# Altium PCB T245_1v1.PcbDoc (part 2 of 2)
Units mm, origin at the board's own origin, x right, y up, seen from the top; angles counter-clockwise.
Board outline 126 x 115 mm, 2 copper layers (Top Layer, Bottom Layer); 137 components, 88 nets, 465 pads, 274 vias.
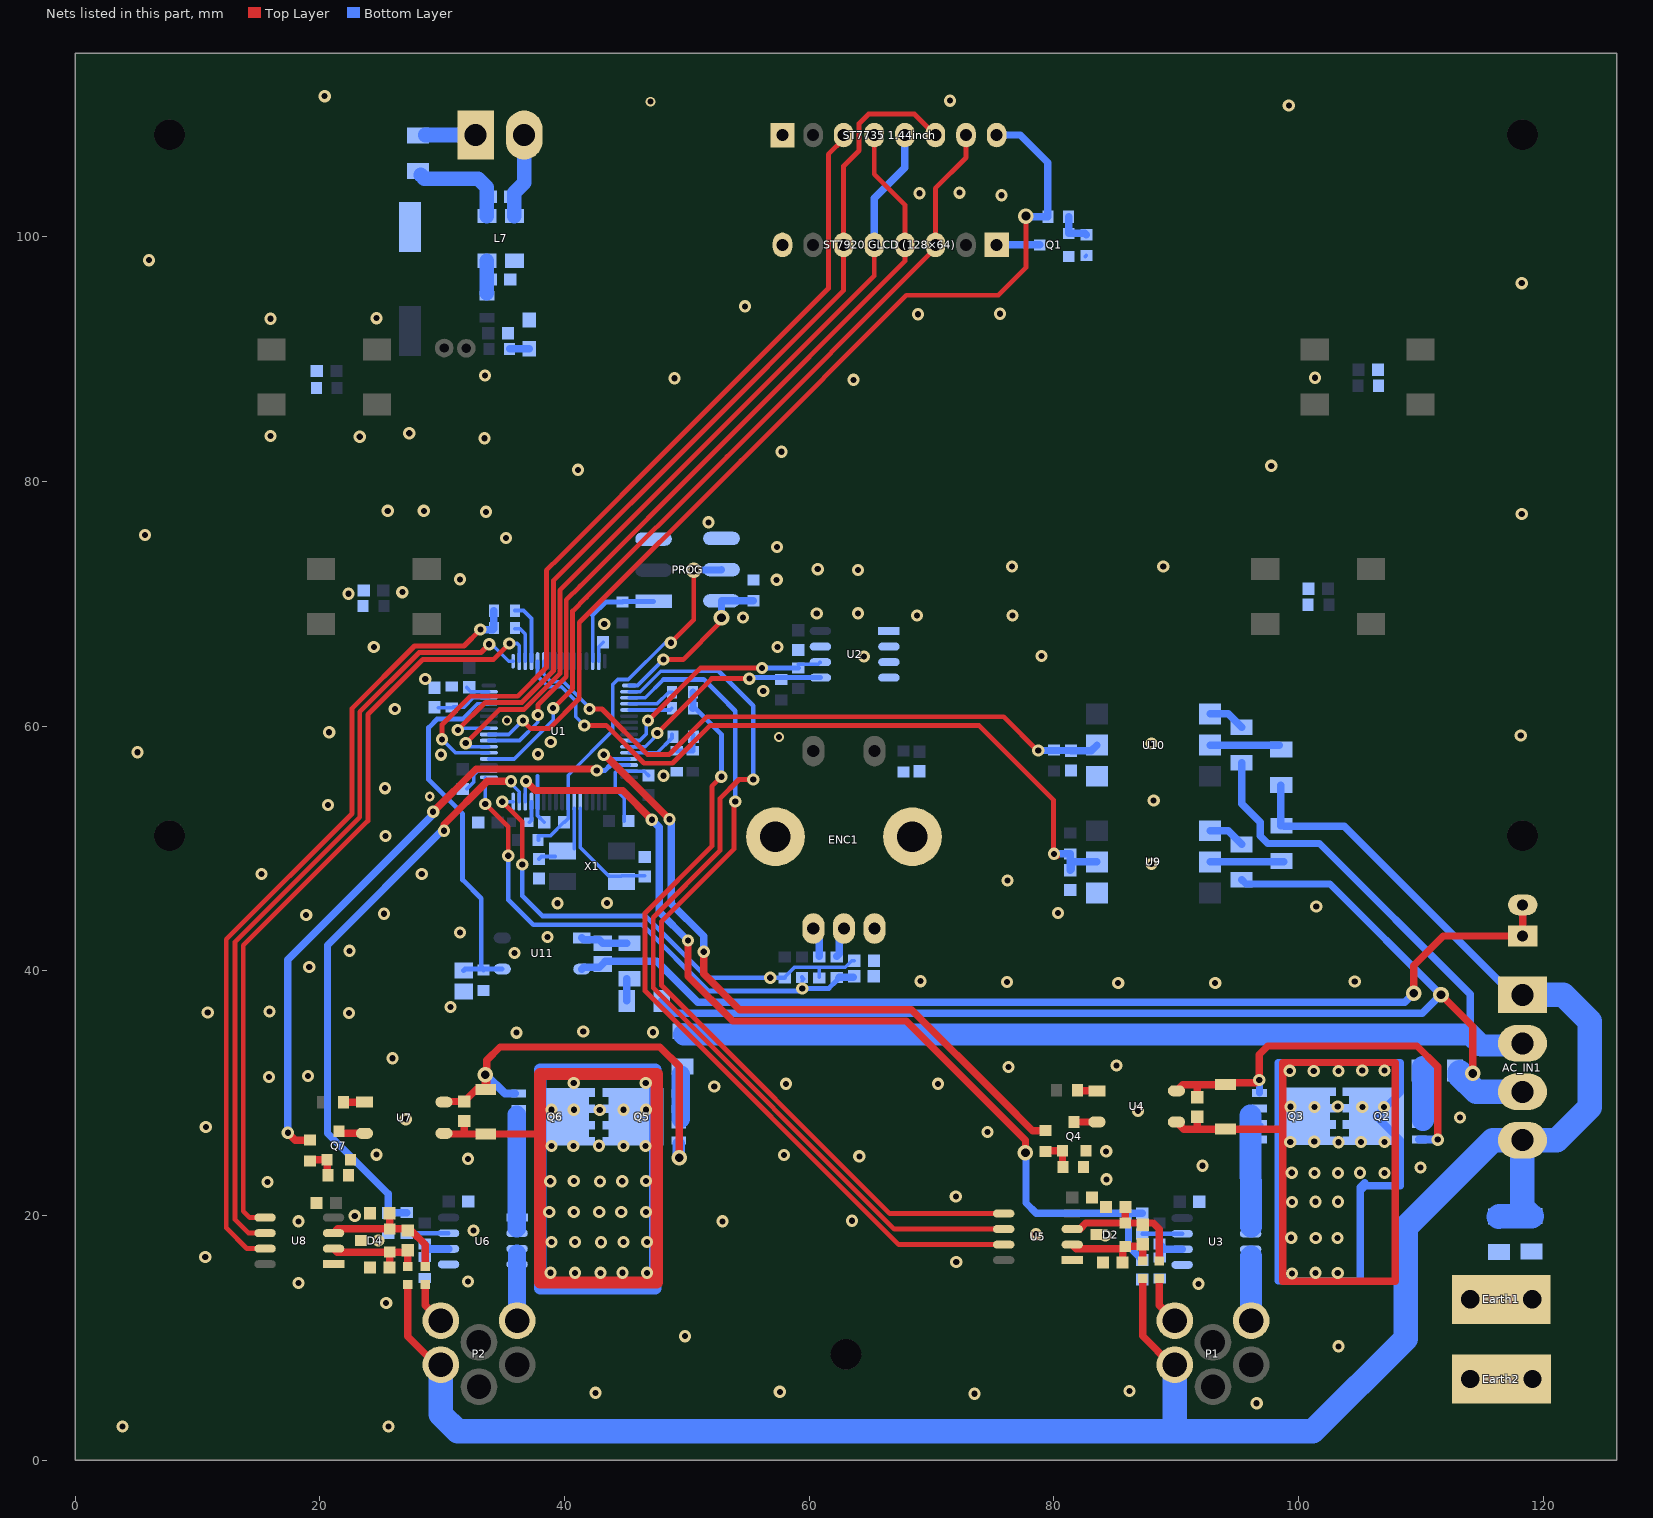
[diagram p2: the nets of this part, all layers, seen from the top]

## Via types
v1: diameter 1, hole 0.5, Top Layer to Bottom Layer, tented both sides, 191 vias
v2: diameter 1, hole 0.5, Top Layer to Bottom Layer, 58 vias
v3: diameter 1.27, hole 0.711, Top Layer to Bottom Layer, tented both sides, 21 vias
v4: diameter 0.8, hole 0.5, Top Layer to Bottom Layer, tented both sides, 3 vias
v5: diameter 0.8, hole 0.4, Top Layer to Bottom Layer, tented both sides, 1 vias

## Nets (pads, with @x,y where several pads share a name; then routed paths per layer and width w, separated by ;. In a path a pad name is that pad's centre, name@x,y a point inside that pad or via, vN(x,y) a via of type N, cw(c..) or ccw(c..) an arc to the next point about the centre after c; other vN are vias at no path point) (continued)
CS_1: U1.50 U5.6 | length 75.9
  Top Layer w0.4: v1(55.42,55.64) 54.25,55.64 52.69,54.08 52.69,49.81 47.24,44.36 47.24,38.6 66.955,18.885 U5.6@75.89,18.885
  Bottom Layer w0.3: U1.50@45.275,62.82 46.19,62.82 47.85,64.48 52.599,64.48
  Bottom Layer w0.4: 52.599,64.48 55.42,61.659 v1(55.42,55.64)
CS_2: U1.33 U8.6 | length 64.1
  Top Layer w0.4: U8.6@15.51,18.555 14.165,18.555 13.04,19.68 13.04,42.34 23.25,52.55 23.25,61.17 28.1,66.02 33.16,66.02 v1(33.83,66.69)
  Bottom Layer w0.3: v1(33.83,66.69) 34.05,66.69 35.432,65.308 U1.33@35.787,65.308
Current_1: C23.1 R23.1 U1.14 | length 79.7
  Top Layer w0.6: v1(36.83,55.5) 37.59,54.74 44.74,54.74 v1(47.13,52.35) ; v1(50.08,42.48) 50.08,39.54 53.73,35.89 67.93,35.89 77.67,26.15 v3(77.67,25.12)
  Bottom Layer w0.3: U1.14@36.787,53.832 36.787,55.5 v1(36.83,55.5)
  Bottom Layer w0.6: v1(47.13,52.35) 47.74,51.74 47.74,44.82 v1(50.08,42.48) ; v3(77.67,25.12) 77.72,25.07 77.72,21.02 78.56,20.18 R23.1@87.21,20.18 ; 86.09,20.13 86.09,17.48 C23.1@87.21,16.36
Current_2: C30.1 R29.1 U1.15 | length 47.9
  Top Layer w0.6: v1(30.14,51.45) 30.14,51.96 33.67,55.49 v1(35.62,55.49) v1@35.74,55.49
  Bottom Layer w0.3: v1@35.68,55.24 36.287,54.633 U1.15@36.287,53.832
  Bottom Layer w0.6: R29.1@27.09,20.23 25.62,20.23 C30.1@25.58,20.19 25.58,21.76 20.61,26.73 20.61,42.09 v1@29.92,51.4
Drive_1: R21.1 U1.61 | length 57
  Top Layer w0.3: v1@43.197,57.473 v1(43.197,57.66)
  Top Layer w0.6: v1@43.249,57.711 47.47,53.49 v1(48.57,52.39) ; v1(51.37,41.56) 51.37,39.75 54.3,36.82 68.36,36.82 75.69,29.49 78.25,26.93 R21.1@79.31,26.93
  Bottom Layer w0.3: v1(43.197,57.66) 43.397,57.66 43.737,57.32 U1.61@45.275,57.32
  Bottom Layer w0.6: v1(48.57,52.39) 48.72,52.24 48.72,45.49 51.37,42.84 v1(51.37,41.56)
Drive_2: R27.1 U1.62 | length 50.5
  Top Layer w0.6: v1(17.37,26.76) 17.98,26.15 R27.1@19.19,26.15 ; v1(29.25,53) 32.75,56.5 v1@42.62,56.5
  Bottom Layer w0.3: 43.747,56.82 U1.62@45.275,56.82
  Bottom Layer w0.4: v1(42.62,56.38) 43.307,56.38 43.747,56.82
  Bottom Layer w0.6: v1(17.37,26.76) 17.37,40.91 v1@29.09,52.63
ENC_A: C9.1 R12.1 R13.1 U1.16 | length 40.5
  Top Layer w0.4: v1(34.9,53.82) 36.53,52.19 v1@36.53,48.77
  Bottom Layer w0.3: v1(34.9,53.82) 35.775,53.82 U1.16@35.787,53.832 ; R12.1@57.99,39.49 58.79,40.29 60.82,40.29 ; R13.1@60.82,39.48 60.82,40.29 ; C9.1@63.68,40.83 63.47,40.83 62.93,40.29 60.82,40.29
  Bottom Layer w0.4: v1(36.53,48.68) 36.53,46.13 38.17,44.49 46.6,44.49 51.66,39.43 v1(56.81,39.43) R12.1@57.99,39.43
ENC_B: C11.1 R11.1 R16.1 U1.17 | length 43.8
  Top Layer w0.4: v1(33.51,53.64) 35.39,51.76 35.39,49.63 v1@35.6,49.42
  Bottom Layer w0.3: v1(33.51,53.64) U1.17@33.51,55.79 ; R11.1@59.41,39.49 R11.1@59.41,39.44 59.52,39.33 59.42,39.23 v1(59.42,38.56) ; R16.1@62.25,39.21 R16.1@62.25,39.44 ; R16.1@62.325,39.365 R16.1@62.44,39.48 ; C11.1@63.6,39.48 C11.1@63.67,39.55
  Bottom Layer w0.4: v1(35.39,49.4) 35.39,45.8 37.43,43.76 46.34,43.76 51.75,38.35 59.21,38.35 v1(59.42,38.56) 61.6,38.56 R16.1@62.25,39.21
  Bottom Layer w0.6: R16.1@62.44,39.48 C11.1@63.6,39.48
GND: "ST7735 1.44inch.1" "ST7920 GLCD (128×64).8" +3V3DC.2 C1.2 C2.2 C3.1 C4.2 C5.2 C6.1 C7.1 C8.1 C9.2 C10.2 C11.2 C12.1 C13.1 C14.1 C15.1 C16.1 C17.1 C18.1 C22.1 C23.2 C24.2 C25.2 C27.1 C29.1 C30.2 C31.2 C32.2 C34.1 C36.1 C37.2 C38.1 C40.2 C42.2 C44.2 CB2.1 CB4.1 CB6.1 CB8.1 D2.3 D4.3 Earth1.1 Earth2.1 ENC1.2 ENC1.6 ENC1.7 F4.2 L7.2 PROG.5 PROG.6 Q1.2 Q4.2 Q7.2 R2.1 R3.1 R5.1 R6.1 R8.1 R10.1 R17.1 R22.1 R28.1 R39.1 R41.1 U1.12 U1.18 U1.31 U1.47 U1.63 U2.1 U2.2 U2.3 U2.4 U2.7 U3.5 U5.1 U6.5 U8.1 U9.4 U10.4 | length 17.7
  Bottom Layer w0.3: C15.1@31.987,63.16 32.327,62.82 U1.31@33.799,62.82 ; C16.1@32.007,54.87 32.557,55.42 32.557,55.99 32.887,56.32 U1.18@33.799,56.32 ; 37.787,55.941 U1.12@37.787,53.832 37.787,52.69 C3.1@38.337,52.14 ; U1.47@42.787,65.308 42.787,66.5 C13.1@43.147,66.86 ; C17.1@44.877,52.24 44.877,54.12 44.137,54.86 44.137,56.22 44.237,56.32 U1.63@45.275,56.32 46.507,56.32 C14.1@46.857,55.97 ; R8.1@82.57,98.39 R8.1@82.65,98.47
  other v1: 3.85,2.74 25.6,2.74 96.57,4.65 73.51,5.42 42.53,5.5 57.59,5.58 86.17,5.66 103.25,9.3 49.84,10.13 25.41,12.84 91.81,14.41 18.24,14.48 32.11,14.6 72.01,16.2 10.62,16.61 24.76,17.95 84.19,18.39 78.53,18.47 32.55,18.76 18.24,19.52 52.91,19.52 63.5,19.57 22.84,19.97 71.98,21.54 15.71,22.74 84.3,22.95 109.96,23.92 92.14,24.06 32.11,24.63 64.09,24.83 57.94,24.95 24.63,24.97 84.27,25.24 74.56,26.82 10.67,27.24 27.01,27.87 113.19,28.01 86.88,28.53 52.23,30.54 58.1,30.76 70.51,30.76 15.84,31.31 19.03,31.41 76.29,32.13 85.12,32.25 25.93,32.85 36.07,34.94 47.22,34.98 41.52,35.04 22.38,36.56 10.82,36.59 15.88,36.67 30.66,37.05 85.25,39 93.18,39 76.17,39.08 104.59,39.12 69.09,39.15 19.12,40.31 35.91,41.46 22.42,41.63 38.6,42.76 31.44,43.14 18.87,44.57 25.24,44.66 80.34,44.72 101.44,45.26 39.41,45.52 43.46,45.54 76.21,47.38 28.32,47.91 15.22,47.92 87.98,48.73 25.36,51.01 20.66,53.56 88.15,53.92 25.32,54.93 48.09,55.94 29.89,57.67 37.83,57.71 5.09,57.87 87.98,58.59 38.86,58.71 118.16,59.23 20.75,59.5 26.12,61.4 56.24,62.87 28.6,63.85 64.47,65.7 78.99,65.74 24.4,66.47 57.39,66.46 43.24,68.36 54.57,68.87 68.81,69.05 76.62,69.05 60.61,69.21 63.98,69.22 22.34,70.82 26.73,70.95 57.33,71.96 31.44,72 63.99,72.77 60.69,72.83 76.58,73.06 88.93,73.06 57.35,74.64 35.2,75.39 5.69,75.63 51.76,76.66 118.24,77.34 33.56,77.52 25.54,77.6 28.49,77.6 41.09,80.95 97.76,81.28 57.73,82.43 33.44,83.53 23.25,83.66 15.96,83.72 27.3,83.94 63.62,88.31 48.98,88.44 101.35,88.48 33.49,88.67 15.96,93.3 24.62,93.35 68.89,93.67 75.6,93.71 54.74,94.32 118.24,96.21 6.03,98.09 75.72,103.4 69.01,103.56 72.28,103.61 99.2,110.73 71.51,111.13 20.38,111.5
  other v4: 57.52,59.12 35.28,60.45 47.01,111.05
  other v5: 28.97,54.24
HIB_1: C44.1 R41.2 U1.29 U11.3 | length 30.6
  Bottom Layer w0.3: 31.64,60.58 32.88,61.82 U1.29@33.799,61.82
  Bottom Layer w0.4: 31.64,60.58 29.58,60.58 28.88,59.88 28.88,55.62 31.66,52.84 31.66,47.43 33.18,45.91 33.18,40.32 R41.2@33.36,40.14 ; C44.1@31.74,40.02 31.86,40.14 R41.2@33.36,40.14 ; R41.2@33.36,40.07 R41.2@33.36,40.14 ; U11.3@34.9,40.14 R41.2@33.36,40.14
MISO_1: CB13.1 CB14.2 U5.7 | length 66.2
  Top Layer w0.4: v1@53.03,55.69 52.63,55.69 52.03,55.09 52.03,50.18 46.57,44.72 46.57,38.36 67.315,17.615 U5.7@75.89,17.615
  Bottom Layer w0.4: CB13.1@50.477,61.46 50.69,61.46 52.81,59.34 v1(52.81,55.86)
  Bottom Layer w0.6: CB13.1@50.477,61.46 50.487,61.47 CB14.2@50.487,62.77
MISO_2: CB5.2 CB7.1 U8.7 | length 66.4
  Top Layer w0.4: U8.7@15.51,17.285 14.035,17.285 12.34,18.98 12.34,42.57 22.63,52.86 22.63,61.45 27.73,66.55 31.77,66.55 v1(33.11,67.89)
  Bottom Layer w0.6: v1(33.11,67.89) 34.143,67.89 34.213,67.96 CB7.1@34.213,69.45
Net+3V3DC_1: +3V3DC.1 R30.1 | length 1.6
  Bottom Layer w0.6: R30.1@35.51,90.84 37.105,90.84 +3V3DC.1@37.11,90.845
NetC12_2: C12.2 CB4.2 U1.30 | length 4.5
  Bottom Layer w0.3: C12.2@29.657,61.513 CB4.2@30.787,61.513 30.86,61.513 30.917,61.57 31.767,61.57 32.517,62.32 U1.30@33.799,62.32
NetC21_1: C21.1 D1.2 Q2.3 Q3.3 U4.3 | length 121.8
  Top Layer w0.6: U4.3@90.01,27.64 90.6,27.05 91.71,27.05 ; C21.1@91.71,27.96 91.71,27.05 ; 91.71,27.05 D1.2@94.02,27.05 98.71,27.05 ; 98.71,27.05 98.71,23.49 98.71,14.61 107.89,14.61 107.89,32.5 98.71,32.5 98.71,27.05
  Bottom Layer w0.6: 105.4,22.68 105.03,22.31 105.03,22 ; 105.03,22 105.03,14.63 105.02,14.64 98.34,14.64 98.34,32.5 108.3,32.5 108.3,30.05 Q2.3@106.35,28.1 108.3,26.15 108.3,22.44 105.47,22.44 105.03,22
  other v1: 99.46,15.26 103.2,15.29 101.38,15.31
  other v2: 101.4,18.15 103.18,18.15 99.39,18.18 99.45,21.09 101.39,21.12 103.22,21.12 101.29,23.48 103.22,23.48 107.03,23.48 99.44,23.49 105.02,23.49 103.27,25.98 99.32,26 105.1,26 107.03,26.01 101.28,26.03 99.33,28.89 101.3,28.87 105.21,28.87 106.99,28.87 103.2,28.9 101.24,31.8 103.26,31.81 99.28,31.82 105.2,31.84 107.03,31.84
NetC21_2: C21.2 D1.1 Q2.1 Q3.1 U4.4 | length 34.5
  Top Layer w0.6: U4.4@90.01,30.19 90.51,30.69 91.76,30.69 ; C21.2@91.71,29.56 91.71,30.64 91.76,30.69 ; v1(111.375,26.195) 111.375,32.155 109.68,33.85 97.47,33.85 96.78,33.16 v1(96.78,31.08) 96.54,30.84 94.17,30.84 D1.1@94.02,30.69 91.76,30.69
  Bottom Layer w0.6: v1(96.78,31.08) 96.8,31.06 Q3.1@96.8,30.005 ; v1@111.145,26.195 v1(111.375,26.195)
  Bottom Layer w0.65: Q2.1@109.85,26.195 v1@111.145,26.195
NetC24_1: C24.1 C26.1 D2.2 L2.1 U5.3 | length 11.5
  Top Layer w0.6: U5.3@81.49,18.885 82.095,18.885 82.59,19.38 D2.2@85.83,19.38 ; C24.1@85.85,20.7 85.83,20.68 D2.2@85.83,19.38 ; L2.1@88.61,16.285 88.61,18.89 88.12,19.38 D2.2@85.83,19.38
NetC26_2: C26.2 C27.2 D2.1 L3.2 U5.2 | length 8.5
  Top Layer w0.6: U5.2@81.49,17.615 81.825,17.28 D2.1@85.63,17.28 ; C27.2@85.61,16.16 85.61,17.26 D2.1@85.63,17.28 ; L3.2@87.25,16.285 87.26,16.295 C26.2@87.26,17.64 87.1,17.48 D2.1@85.83,17.48 D2.1@85.63,17.28
NetC28_1: C28.1 D3.2 Q5.3 Q6.3 U7.3 | length 116.9
  Top Layer w0.6: U7.3@29.92,26.66 31.78,26.66 ; C28.1@31.79,27.72 31.79,26.67 31.78,26.66 ; 37.99,26.66 D3.2@33.55,26.66 31.78,26.66
  Top Layer w1: 37.99,14.51 37.99,20.29 37.99,25.67 37.99,26.66 37.99,31.56 47.52,31.56 47.52,14.51 37.99,14.51
  Bottom Layer w1: 38.01,14.03 47.41,14.03 47.41,25.67 47.41,31.93 38.01,31.93 38.01,25.67 38.01,14.03
  other v2: 38.84,15.32 40.85,15.31 42.93,15.31 44.73,15.32 46.74,15.31 42.98,17.81 38.92,17.83 40.85,17.84 44.81,17.83 46.74,17.84 40.75,20.28 42.83,20.28 46.64,20.28 38.74,20.29 44.63,20.29 42.88,22.78 38.82,22.8 40.75,22.81 44.71,22.8 46.64,22.81 38.93,25.67 40.71,25.67 44.82,25.67 46.6,25.67 42.81,25.7 42.87,28.61 38.92,28.64 40.75,28.64 44.81,28.64 46.64,28.64 40.74,30.83 46.63,30.83
NetC28_2: C28.2 D3.1 Q5.1 Q6.1 U7.4 | length 36.1
  Top Layer w0.6: U7.4@29.91,29.32 C28.2@31.79,29.32 32.85,30.38 D3.1@33.63,30.38 ; v3(33.5,31.5) 33.5,30.51 D3.1@33.63,30.38 ; D3.1@33.55,30.3 D3.1@33.63,30.38 ; v3(49.36,24.72) 49.36,32.19 47.78,33.77 34.72,33.77 33.63,32.68 D3.1@33.63,30.38
  Bottom Layer w0.65: v3@33.59,31.5 35.13,29.96 Q6.1@35.935,29.96
  Bottom Layer w0.8: v3(33.5,31.5) v3@33.59,31.5
  Bottom Layer w1: v3@49.33,24.94 Q5.1@49.33,25.88
NetC31_1: C31.1 C33.1 D4.2 L4.1 U8.3 | length 11.3
  Top Layer w0.6: U8.3@21.11,18.555 21.455,18.9 D4.2@25.7,18.9 ; C31.1@25.69,20.18 25.7,20.17 D4.2@25.7,18.9 ; L4.1@28.61,15.815 28.61,17.62 27.47,18.76 C33.1@27.17,18.76 27.03,18.9 D4.2@25.7,18.9
NetC33_2: C33.2 C34.2 D4.1 L5.2 U8.2 | length 8.8
  Top Layer w0.6: U8.2@21.11,17.285 21.395,17 D4.1@25.7,17 ; C34.2@25.69,15.75 25.7,15.76 D4.1@25.7,17 ; L5.2@27.17,15.815 C33.2@27.17,17.16 27.01,17 D4.1@25.7,17
NetC35_1: C35.1 DC_IN.2 L7.1 | length 7
  Bottom Layer w1.2: L7.1@35.885,101.695 35.885,103.605 36.69,104.41 DC_IN.2@36.69,108.32
NetC35_2: C35.2 F3.2 L7.4 | length 8.2
  Bottom Layer w1.2: F3.2@28.24,105.06 28.54,104.76 32.92,104.76 33.635,104.045 L7.4@33.635,101.695
NetC36_2: C36.2 L6.1 L7.3 | length 2.7
  Bottom Layer w1.2: L6.1@33.635,95.39 L7.3@33.635,98.045
NetC43_1: C43.1 R40.2 U11.1 | length 3.9
  Bottom Layer w0.6: U11.1@41.4,42.69 41.55,42.54 42.82,42.54 C43.1@43.11,42.25 R40.2@45.07,42.25
NetC43_2: C43.2 SLPD.1 SLPD.2 U11.2 | length 84.7
  Top Layer w0.6: v3(109.41,38.16) 109.41,40.43 111.83,42.85 SLPD.1@118.32,42.85 SLPD.2@118.32,45.39
  Bottom Layer w0.6: U11.2@41.4,40.14 41.55,40.29 42.85,40.29 C43.2@43.11,40.55 43.33,40.77 47.54,40.77 50.87,37.44 108.69,37.44 v3(109.41,38.16)
NetCB1_2: CB1.2 CB2.2 R4.1 | length 2.6
  Bottom Layer w0.4: CB2.2@49.17,57.97 CB1.2@50.47,57.97 ; CB1.2@50.48,57.97 R4.1@50.48,59.31
NetCB5_1: CB5.1 U1.35 | length 3.3
  Bottom Layer w0.3: CB5.1@35.927,67.96 36.35,67.96 36.787,67.523 U1.35@36.787,65.308
NetCB6_2: CB6.2 R20.2 U3.6 | length 3.3
  Bottom Layer w0.6: R20.2@88.63,17.68 R20.2@88.64,17.67 ; CB6.2@88.64,16.447 CB6.2@88.64,16.567 R20.2@88.64,17.67 ; R20.2@89.075,17.235 R20.2@88.64,17.67
  Bottom Layer w0.65: R20.2@89.075,17.235 U3.6@90.48,17.235
NetCB7_2: CB7.2 U1.36 | length 5.1
  Bottom Layer w0.3: CB7.2@35.927,69.45 36.63,69.45 37.287,68.793 U1.36@37.287,65.308
NetCB8_2: CB8.2 R26.2 U6.6 | length 3.3
  Bottom Layer w0.6: R26.2@28.57,17.68 R26.2@28.58,17.67 ; CB8.2@28.58,16.487 CB8.2@28.58,16.607 R26.2@28.58,17.67 ; R26.2@28.975,17.275 R26.2@28.58,17.67
  Bottom Layer w0.65: R26.2@28.975,17.275 U6.6@30.51,17.275
NetCB13_2: CB13.2 U1.53 | length 3.5
  Bottom Layer w0.3: U1.53@45.275,61.32 48.623,61.32 CB13.2@48.763,61.46
NetCB14_1: CB14.1 U1.52 | length 3.9
  Bottom Layer w0.3: U1.52@45.275,61.82 47.55,61.82 48.5,62.77 CB14.1@48.773,62.77
NetD5_1: D5.1 R40.1 | length 1.8
  Bottom Layer w0.6: D5.1@45.07,37.54 R40.1@45.07,39.35
NetDC_IN_1: DC_IN.1 F3.1 | length 4.1
  Bottom Layer w1.2: F3.1@28.6,108.32 DC_IN.1@32.73,108.32
NetENC1_1: ENC1.1 R13.2 | length 2.5
  Bottom Layer w0.6: ENC1.1@60.33,43.46 60.82,42.97 R13.2@60.82,41.18
NetENC1_3: ENC1.3 R16.2 | length 2.5
  Bottom Layer w0.6: R16.2@62.25,41.18 62.44,41.37 62.44,43.07 ENC1.3@62.83,43.46
NetF1_1: F1.1 Q2.2 | length 4.3
  Bottom Layer w1.8: 110.16,27.82 110.16,30.005 F1.1@110.16,32.13
NetF2_1: F2.1 Q5.2 | length 3.6
  Bottom Layer w1.5: 49.48,27.88 49.48,29.955 F2.1@49.48,31.52
NetL1_1: L1.1 U1.13 | length 1.8
  Bottom Layer w0.3: L1.1@37.106,52.13 37.287,52.312 U1.13@37.287,53.832
NetP1_5: P1.5 U3.3 U3.4 | length 5.2
  Bottom Layer w1.8: P1.5@96.12,11.4 96.12,16.65
NetP2_5: P2.5 U6.3 U6.4 | length 5.5
  Bottom Layer w1.5: 36.11,16.86 U6.4@36.11,16.005 36.11,11.41 P2.5@36.12,11.4
NetQ1_1: Q1.1 R7.2 R8.2 | length 2.8
  Bottom Layer w0.6: R7.2@81.2,101.64 Q1.1@81.2,100.29 82.53,100.29 R8.2@82.65,100.17
NetQ1_3: "ST7920 GLCD (128×64).1" Q1.3 | length 3.5
  Bottom Layer w0.6: 75.31,99.34 Q1.3@78.85,99.34
NetQ3_2: Q3.2 U3.1 U3.2 | length 9.8
  Bottom Layer w0.254: U3.2@96.08,18.505 96.09,19.1 ; Q3.2@96.99,27.335 Q3.2@96.99,27.424
  Bottom Layer w1.8: 96.076,28.15 96.077,27.464 ; 96.077,27.53 96.077,27.464 ; 96.09,19.1 96.089,19.775 96.079,26.194 96.077,27.464
NetQ4_1: Q4.1 R21.2 R22.2 | length 2.9
  Top Layer w0.6: R21.2@79.31,25.23 79.37,25.29 Q4.1@80.7,25.29 80.7,23.85 R22.2@80.72,23.83
NetQ4_3: Q4.3 U4.2 | length 1.9
  Top Layer w0.6: Q4.3@81.65,27.64 U4.2@83.51,27.64
NetQ6_2: Q6.2 U6.1 U6.2 | length 10.1
  Bottom Layer w1.5: 36.09,18.96 36.09,19.815 36.09,28.24 ; 36.11,19.02 U6.1@36.11,19.815
NetQ7_1: Q7.1 R27.2 R28.2 | length 2.7
  Top Layer w0.6: R27.2@19.19,24.45 19.29,24.55 20.59,24.55 R28.2@20.59,23.28
NetQ7_3: Q7.3 U7.2 | length 2.2
  Top Layer w0.6: Q7.3@21.47,26.73 21.485,26.715 U7.2@23.64,26.715
NetR4_2: R4.2 U1.60 | length 4.3
  Bottom Layer w0.3: U1.60@45.275,57.82 47.57,57.82 48.78,59.03 R4.2@48.78,59.31
NetR19_1: R19.1 U4.1 | length 1.6
  Top Layer w0.6: R19.1@81.92,30.24 81.97,30.19 U4.1@83.51,30.19
NetR23_2: R23.2 U3.7 | length 3.3
  Bottom Layer w0.3: R23.2@87.21,18.48 R23.2@87.235,18.505
  Bottom Layer w0.35: R23.2@87.235,18.505 U3.7@90.48,18.505
NetR25_1: R25.1 U7.1 | length 1.7
  Top Layer w0.6: R25.1@21.92,29.25 21.935,29.265 U7.1@23.64,29.265
NetR29_2: R29.2 U6.7 | length 3.4
  Bottom Layer w0.35: R29.2@27.09,18.53 27.105,18.545 U6.7@30.51,18.545
NetR32_2: R32.2 U9.1 | length 3
  Bottom Layer w0.6: U9.1@92.76,51.45 94.24,51.45 R32.2@95.35,50.34
NetR33_2: R33.2 U9.2 | length 6.1
  Bottom Layer w0.6: U9.2@92.76,48.9 92.78,48.92 R33.2@98.81,48.92
NetR36_2: R36.2 U10.1 | length 3
  Bottom Layer w0.6: U10.1@92.77,61 94.25,61 R36.2@95.34,59.91
NetR37_2: R37.2 U10.2 | length 5.7
  Bottom Layer w0.6: U10.2@92.77,58.45 92.79,58.43 R37.2@98.43,58.43
nRST: C3.2 PROG.4 R1.1 U1.7 | length 30.9
  Top Layer w0.4: v1(48.68,66.82) 50.55,68.69 v3(50.55,72.76)
  Bottom Layer w0.3: R1.1@37.857,50.69 37.857,51.04 38.837,51.04 C3.2@39.937,52.14 ; C3.2@39.987,52.14 40.287,52.44 U1.7@40.287,53.832 40.287,55.987 43.94,59.64 43.94,63.41 44.34,63.81 45.21,63.81 48.22,66.82 v1(48.68,66.82)
  Bottom Layer w0.6: v3(50.55,72.76) 52.787,72.76 PROG.4@52.822,72.795
SCK_1: U1.51 U5.5 | length 70.9
  Top Layer w0.4: v1@53.83,53.85 53.83,49.95 47.93,44.05 47.93,38.8 66.575,20.155 U5.5@75.89,20.155
  Bottom Layer w0.3: U1.51@45.275,62.32 46.58,62.32 48.08,63.82
  Bottom Layer w0.4: 48.08,63.82 51.37,63.82 52.718,62.472 53.95,61.24 v1(53.95,53.85)
SCK_2: U1.34 U8.5 | length 62.9
  Top Layer w0.4: U8.5@15.51,19.825 14.255,19.825 13.73,20.35 13.73,42.08 23.91,52.26 23.91,60.95 28.42,65.46 34.19,65.46 v1(35.48,66.75)
  Bottom Layer w0.3: v1(35.48,66.75) 36.12,66.75 36.287,66.583 U1.34@36.287,65.308
SCL: R14.1 U1.58 U2.6 | length 18.7
  Top Layer w0.4: v1(46.81,60.45) 51.12,64.76 v1(56.13,64.76)
  Bottom Layer w0.3: U1.58@45.275,58.82 46.14,58.82 46.66,59.34 46.66,60.3 v1(46.81,60.45) ; R14.1@59.12,65.06 60.734,65.06 U2.6@60.908,65.234
  Bottom Layer w0.4: v1(56.13,64.76) R14.1@59.11,64.76
SDA: R15.1 U1.59 U2.5 | length 17.8
  Top Layer w0.4: v1(47.57,59.43) 52.02,63.88 v1(55.1,63.88)
  Bottom Layer w0.3: U1.59@45.275,58.32 46.59,58.32 47.283,59.013 v1@47.283,59.327
  Bottom Layer w0.4: v1(55.1,63.88) 55.184,63.964 55.795,63.964 55.799,63.96 56.461,63.96 56.465,63.964 U2.5@60.908,63.964
SWCLK: PROG.2 R10.2 U1.49 | length 14.5
  Top Layer w0.4: v1@48.07,65.42 v1(48.07,65.44) 49.69,65.44 52.692,68.442 52.692,68.98 v3(52.822,68.85)
  Bottom Layer w0.3: U1.49@45.275,63.32 45.95,63.32 47.955,65.325 48.07,65.21 v1(48.07,65.44)
  Bottom Layer w0.6: v3(52.822,68.85) PROG.2@52.822,70.245 52.827,70.24 R10.2@55.417,70.24
SWD: PROG.1 R9.1 U1.46 | length 9.2
  Bottom Layer w0.3: U1.46@42.287,65.308 42.287,69.097 ; R9.1@44.73,70.15 R9.1@44.775,70.195
  Bottom Layer w0.4: 42.287,69.097 43.34,70.15 R9.1@44.73,70.15 ; R9.1@44.775,70.195 PROG.1@47.272,70.195
TC_NEG_1: AC_IN1.1 AC_IN1.4 F4.1 L3.1 L5.1 P1.2 P2.2 R33.1 R37.1 R39.2 | length 187.3
  Top Layer w0.6: L5.1@27.17,14.365 27.17,10.11 29.48,7.8 P2.2@29.88,7.8 ; L3.1@87.25,14.835 87.25,10.14 89.59,7.8 P1.2@89.88,7.8
  Bottom Layer w0.6: R33.1@98.54,51.86 R37.1@98.54,55.18 ; R33.1@98.81,51.82 103.72,51.82 117.51,38.03 AC_IN1.1@118.3,38.03
  Bottom Layer w2: P2.2@29.88,7.8 29.88,3.73 31.26,2.35 101.17,2.35 108.74,9.92 108.74,19.02 115.87,26.15 AC_IN1.4@118.3,26.15 ; 89.88,2.77 P1.2@89.88,7.8 ; R39.2@116.37,19.9 116.41,19.94 F4.1@119.04,19.94 118.3,20.68 AC_IN1.4@118.3,26.15 ; AC_IN1.1@118.3,38.03 121.64,38.03 123.8,35.87 123.8,28.83 121.12,26.15 AC_IN1.4@118.3,26.15
TC_POS_1: L2.2 P1.1 | length 4
  Top Layer w0.6: L2.2@88.61,14.835 88.61,12.67 P1.1@89.88,11.4
TC_POS_2: L4.2 P2.1 | length 3.5
  Top Layer w0.6: L4.2@28.61,14.365 28.61,12.67 P2.1@29.88,11.4
TFT_BCLT: "ST7735 1.44inch.8" R7.1 U1.24 | length 79.5
  Top Layer w0.4: v1(36.58,60.46) 37.24,59.8 38.73,59.8 41.19,62.26 41.19,68.47 54.43,81.71 67.94,95.22 75.46,95.22 77.71,97.47 v3(77.71,101.7)
  Bottom Layer w0.3: U1.24@33.799,59.32 35.44,59.32 v1(36.58,60.46)
  Bottom Layer w0.6: 75.31,108.32 77.25,108.32 79.5,106.07 R7.1@79.5,101.64 77.77,101.64 v3(77.71,101.7)
TFT_CS: "ST7735 1.44inch.7" "ST7920 GLCD (128×64).3" U1.20 | length 68.4
  Top Layer w0.4: v1(39.06,61.47) 40.65,63.06 40.65,69.4 41.78,70.53 53.28,82.03 70.31,99.06 70.31,99.34 70.31,103.97 72.81,106.47 72.81,108.32
  Bottom Layer w0.3: U1.20@33.799,57.32 35.88,57.32 39.06,60.5 v1(39.06,61.47)
TFT_D/I: "ST7735 1.44inch.6" "ST7920 GLCD (128×64).6" U1.25 | length 74.8
  Top Layer w0.4: v1(31.27,59.69) 33.51,61.93 36.5,61.93 39.08,64.51 39.08,71.89 40.21,73.02 50.49,83.3 62.81,95.62 62.81,99.34 62.81,105.79 64.06,107.04 64.06,109.25 64.84,110.03 68.6,110.03 70.31,108.32
  Bottom Layer w0.3: v1(31.27,59.69) 31.4,59.82 U1.25@33.799,59.82
TFT_E: "ST7735 1.44inch.4" "ST7920 GLCD (128×64).4" U1.23 | length 66.1
  Top Layer w0.4: v1(37.81,60.9) 37.81,61.73 40.13,64.05 40.13,70.32 41.26,71.45 52.3,82.49 67.81,98 67.81,99.34 67.81,102.62 65.31,105.12 65.31,108.32
  Bottom Layer w0.3: U1.23@33.799,58.82 36.31,58.82 37.81,60.32 v1(37.81,60.9)
TFT_RST: "ST7735 1.44inch.5" "ST7920 GLCD (128×64).5" U1.22 | length 67.9
  Top Layer w0.4: v1(31.92,58.61) 34.66,61.35 36.67,61.35 39.61,64.29 39.61,71.11 65.31,96.81 65.31,99.34
  Bottom Layer w0.3: v1(31.92,58.61) 31.92,58.33 31.93,58.32 U1.22@33.799,58.32
  Bottom Layer w0.6: 65.31,99.34 65.31,103.15 67.81,105.65 67.81,108.32
TFT_SCK: "ST7735 1.44inch.3" U1.21 | length 69.6
  Top Layer w0.4: v1(29.97,58.92) 29.97,60.12 32.29,62.44 36.16,62.44 38.51,64.79 38.51,72.73 39.64,73.86 49.59,83.81 61.56,95.78 61.56,106.75 62.81,108 62.81,108.32
  Bottom Layer w0.3: v1(29.97,58.92) 31.07,57.82 U1.21@33.799,57.82
XTAL1: C6.2 U1.5 X1.1 | length 9.4
  Bottom Layer w0.3: U1.5@41.287,53.272 41.287,50.05 43.597,47.74 44.637,47.74 44.657,47.76 C6.2@46.547,47.76
XTAL2: C7.2 U1.6 X1.3 | length 4.7
  Bottom Layer w0.3: C7.2@37.897,49.14 38.107,49.35 X1.3@39.217,49.35 ; X1.3@40.787,49.97 U1.6@40.787,53.272
ZC_1: C40.1 R31.1 U1.37 U9.5 | length 61.1
  Top Layer w0.4: v1(41.61,60.06) 43.4,60.06 46.49,56.97 48.82,56.97 51.91,60.06 73.86,60.06 79.95,53.97 79.95,49.68 v1@80.28,49.35
  Bottom Layer w0.3: U1.37@37.787,65.308 37.787,64.103 38.66,63.23 39.74,63.23 40.91,62.06 40.91,60.76 v1(41.61,60.06)
  Bottom Layer w0.6: v1(80,49.56) 81.32,49.56 R31.1@81.33,49.55 C40.1@81.33,48.21 81.42,48.3 81.42,48.9 U9.5@83.51,48.9
ZC_2: C42.1 R35.1 U1.38 U10.5 | length 51.8
  Top Layer w0.4: v1(42.03,61.4) 43.05,61.4 46.78,57.67 48.53,57.67 51.63,60.77 75.88,60.77 78.72,57.93 v1@78.9,58.11
  Bottom Layer w0.3: U1.38@38.287,65.308 38.287,64.233 38.89,63.63 39.906,63.63 v1@41.99,61.546
  Bottom Layer w0.6: v1(78.72,58.01) 81.36,58.01 C42.1@81.39,57.98 83.05,57.98 U10.5@83.52,58.45
~12V: AC_IN1.2 F2.2 R36.1 | length 99.8
  Bottom Layer w0.6: R36.1@95.34,57.01 95.34,53.66 96.86,52.14 96.86,51.02 97.47,50.41 101.71,50.41 114.04,38.08 114.04,35.06
  Bottom Layer w1.8: F2.2@49.74,34.8 114.04,34.8 114.93,33.91 AC_IN1.2@117,33.91
~24V: AC_IN1.3 D5.2 F1.2 R32.1 | length 98.2
  Top Layer w0.6: v3(111.64,38.04) 114.23,35.45 114.23,32.01 v3@114.38,31.86
  Bottom Layer w0.6: D5.2@47.93,37.54 48.94,36.53 110.1,36.53 v3@111.61,38.04 ; R32.1@95.35,47.44 95.7,47.09 102.56,47.09 v3@111.61,38.04 ; v3(111.64,38.04) v3@111.61,38.04
  Bottom Layer w2: F1.2@113.19,31.72 113.19,31.43 114.51,30.11 AC_IN1.3@118.3,30.11
  other v3: 114.24,31.61
pads on no net: P1.3 P1.4 P1.6 P2.3 P2.4 P2.6 U1.2 U1.3 U1.4 U1.26 U1.27 U1.28 U1.40 U1.41 U1.42 U1.43 U1.44 U1.45 U1.54 U1.55 U1.56 U1.57 U5.8 U8.8 U9.3 U9.6 U10.3 U10.6 X1.2 X1.4

## Polygon pours and split planes (outlines as drawn)
GND on Bottom Layer "Ground_Plane" (solid, remove dead copper, pour order 2): 0,115 126,115 126,0 0,0
GND on Top Layer "GND_L01_P000" (solid, remove dead copper, pour order 0): 0,115 126,115 126,0 0,0

## Keep-outs
Keep-Out Layer:
  the board outline again, w0.2

## Other copper
Top Layer:
  rectangle net NetC28_1: 37.99,14.05 47.52,31.56
  rectangle net NetC21_1: 98.71,14.61 107.89,32.5
  pour cut-out: 46.06,44.673 46.06,46.14 44.8,46.14
  pour cut-out: 16.67,19.9 16.67,15.99 16.06,15.99
  pour cut-out: 19.923,19.825 19.923,17.3 20.2,17.3
  pour cut-out: 18.38,24.98 18.38,25.55 18.63,25.55
  pour cut-out: 21.34,28.44 20.74,28.44 20.74,28.64
  pour cut-out: 34.21,25.91 37.88,25.91 37.88,26.29
  pour cut-out: 35.8,26.13 37.35,26.13 37.35,24.86
  pour cut-out: 77.077,20.155 77.077,16.32 76.67,16.32
  pour cut-out: 80.303,17.615 80.303,20.74 80.77,20.74
  pour cut-out: 86.11,15.37 86.81,15.37 86.81,15.73
  pour cut-out: 108.502,31.902 108.502,33.29 108.8,33.29
  pour cut-out: 79.527,58.01 79.527,55.07 79.116,55.07
  pour cut-out: 62.83,45.02 60.32,45.02 60.32,44.59
  pour cut-out: 60.33,41.9 62.85,41.9 62.85,42.55
  pour cut-out: 56.227,55.64 56.227,56.91 55.95,56.91
  pour cut-out: 54.757,53.85 54.757,54.833 55.42,54.833
  pour cut-out: 47.08,61.43 44.32,61.43 44.32,61.04
  pour cut-out: 55.27,63.27 55.27,62.25 54.58,62.25
Bottom Layer:
  rectangle net NetC21_1: 98.06,14.63 105.03,22.6
  rectangle net NetC28_1: 38.01,14.03 47.41,31.93
  rectangle net NetC21_1: 98.5,22.44 108.3,32.5
  rectangle net NetC21_1: 99.63,25.74 106.26,30.43
  rectangle net NetC28_1: 39.06,25.71 47.47,30.39
  pour cut-out: 28.071,11.4 28.071,7.66 29.4,7.66
  pour cut-out: 29.88,13.209 35.37,13.209 35.37,12.34
  pour cut-out: 37.929,11.4 37.929,7.71 37.3,7.71
  pour cut-out: 33.42,30.76 33.42,10.67 36.3,10.67
  pour cut-out: 50.82,32.5 50.82,11.34 35.87,11.34
  pour cut-out: 49.65,33.1 36.88,33.1 36.88,29.65
  pour cut-out: 37.73,9.7 37.73,11.5 39.45,11.5
  pour cut-out: 32.49,13.1 33.49,13.1 33.49,13.88
  pour cut-out: 99.39,33.14 93.09,33.14 93.09,11.17
  pour cut-out: 105.642,21.747 105.642,11.09 97.37,11.09
  pour cut-out: 97.929,7.8 97.929,11.28 97.5,11.28
  pour cut-out: 106.94,33.11 110.17,33.11 110.17,32.69
  pour cut-out: 111.37,28.439 111.37,26.78 111,26.78
  pour cut-out: 102.94,49.9 102.94,51.35 101.98,51.35
  pour cut-out: 93.47,47.76 94.43,47.76 94.43,48.05
  pour cut-out: 91.57,49.69 91.57,50.53 92.02,50.53
  pour cut-out: 91.57,60.33 91.57,59.29 91.88,59.29
  pour cut-out: 93.54,57.3 94.34,57.3 94.34,57.8
  pour cut-out: 97.77,57.12 96.41,57.12 96.41,57.58
  pour cut-out: 99.78,57.36 99.78,55.88 99.43,55.88
  pour cut-out: 64.47,40.15 64.47,37.92 63.94,37.92
  pour cut-out: 57.19,41.56 57.19,40.02 57.33,40.02
  pour cut-out: 33.641,50.437 34.611,50.437 34.611,49.191
  pour cut-out: 34.846,62.32 34.846,59.69 34.61,59.69
  pour cut-out: 43.01,54.86 40.66,54.86 40.66,54.52
  pour cut-out: 46.322,55.82 46.322,54.93 45.98,54.93
  pour cut-out: 47.18,57.35 48.4,57.35 48.4,57.91
  pour cut-out: 51.12,55.57 52.239,55.57 52.239,56.431
  pour cut-out: 43.93,68.835 43.93,69.66 44.19,69.66
  pour cut-out: 37.746,66.388 41.88,66.388 41.88,66.2
  pour cut-out: 56.91,62.54 56.91,63.33 57.14,63.33
  pour cut-out: 91.667,19.775 91.667,17.27 91.36,17.27

## Silkscreen, mask and mechanical layers (free items; w line width, h text height)
Top Overlay:
  lines w0.2: 93.15,99.57 120.84,99.57 120.84,104.62 93.15,104.62 93.15,99.57 ; 93.17,99.5 93.17,104.55 120.86,104.55 120.86,99.5 93.17,99.5
  text "JBCT245_20515_1v1 / © Aurimas Vilkas 2020. All rights reserved." at 93.93,100.22 h1.5
Bottom Overlay:
  lines w0.2: 93.03,99.63 120.72,99.63 120.72,104.68 93.03,104.68 93.03,99.63 ; 93.05,99.56 93.05,104.61 120.74,104.61 120.74,99.56 93.05,99.56
  text "JBCT245_20515_1v1 / © Aurimas Vilkas 2020. All rights reserved." at 119.88,100.3 h1.5

## Dimensions
7.7,51.05 to -2.3,-3.35 on Mechanical 15
7.7,51.05 to -2.3,118.35 on Mechanical 15
7.7,108.35 to -2.3,118.35 on Mechanical 15
7.7,108.35 to -2.3,118.35 on Mechanical 15
118.3,51.05 to 126,0 on Mechanical 15
118.3,108.35 to 126,115 on Mechanical 15
118.3,108.35 to 126,115 on Mechanical 15
118.3,51.05 to 126,115 on Mechanical 15
118.3,51.05 to 126,0 on Mechanical 15
63,8.65 to 63,-3.35 on Mechanical 15
63,8.65 to -2.3,-3.35 on Mechanical 15
128.3,-3.35 to 63,8.65 on Mechanical 15
126,0 to 126.12,-3.35 on Mechanical 15
126,115 to 126.31,118.35 on Mechanical 15
126,0 to 128.3,0.01 on Mechanical 15
0,0 to -2.3,0.21 on Mechanical 15
0,115 to 126,115 on Mechanical 1
0,115 to 0,0 on Mechanical 1